# Altium PCB ArDINo.PcbDoc
Units mil, origin at the board's own origin, x right, y up, seen from the top; angles counter-clockwise.
Board outline 3419.29 x 6153.54 mil, 4 copper layers (Top Layer, Internal Plane 1, Mid-Layer 1, Bottom Layer); 40 components, 30 nets, 136 pads, 0 vias.
Unrouted connection lines stored in the file: 49.
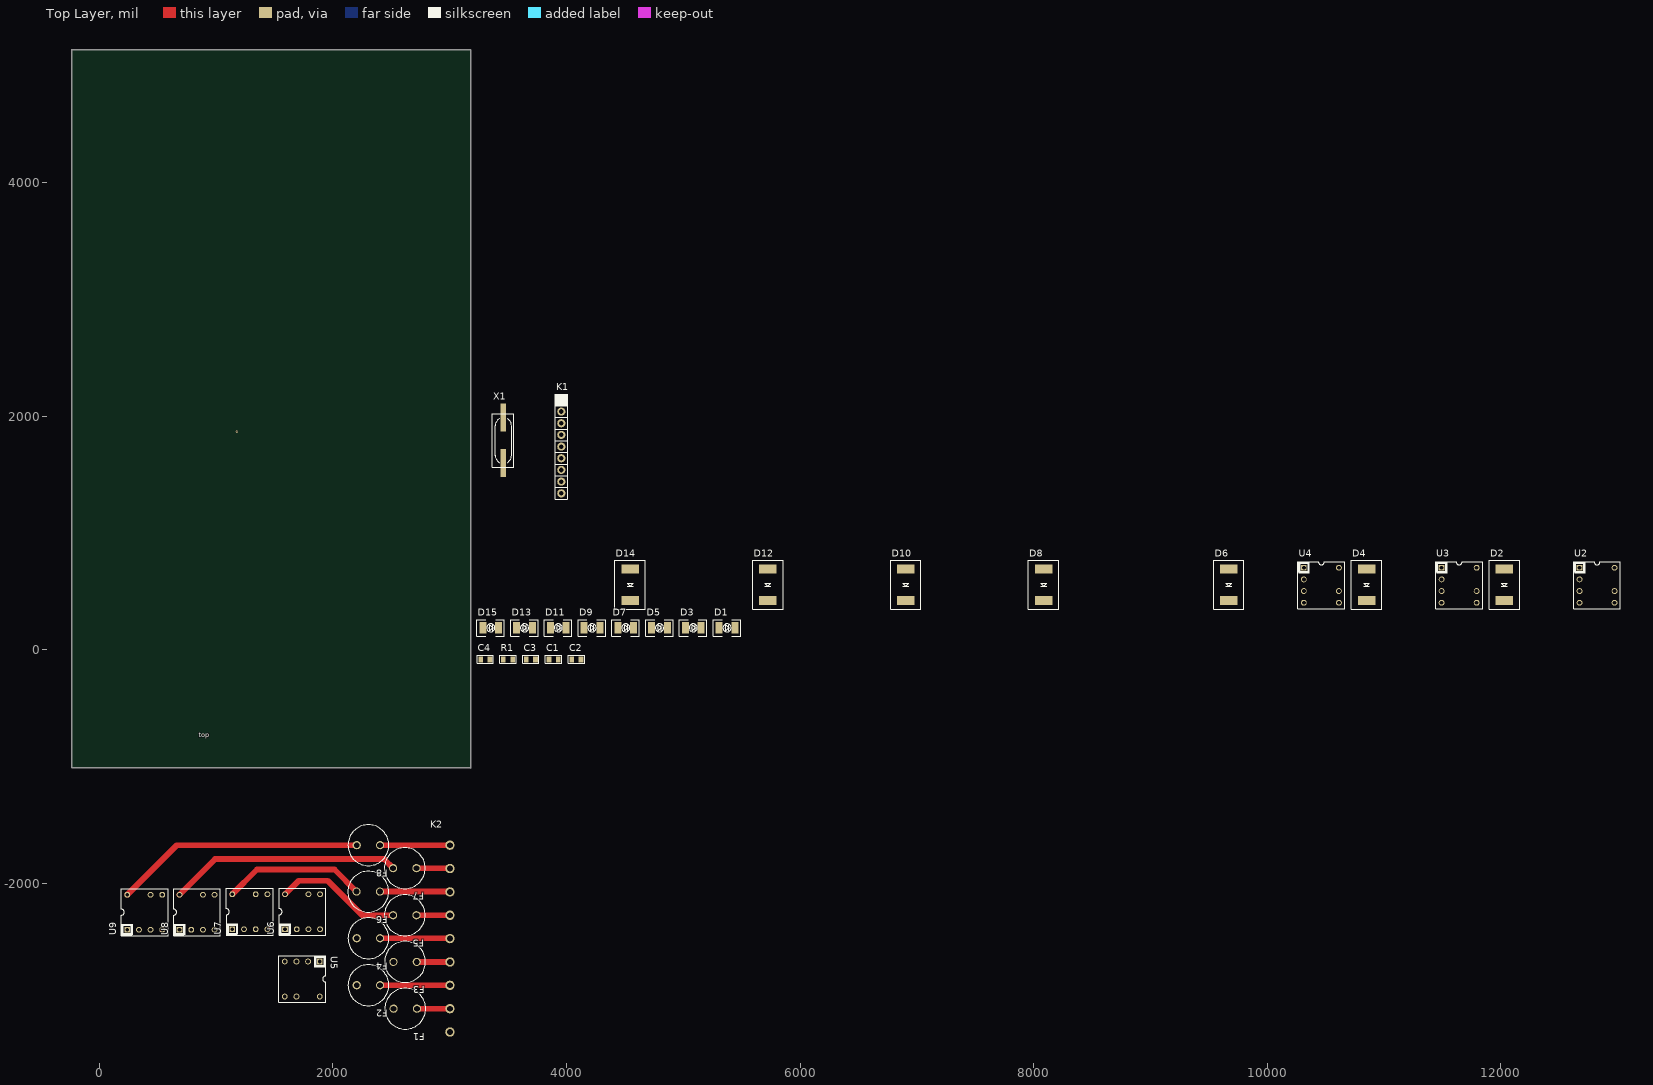
[diagram p0: Top Layer view]
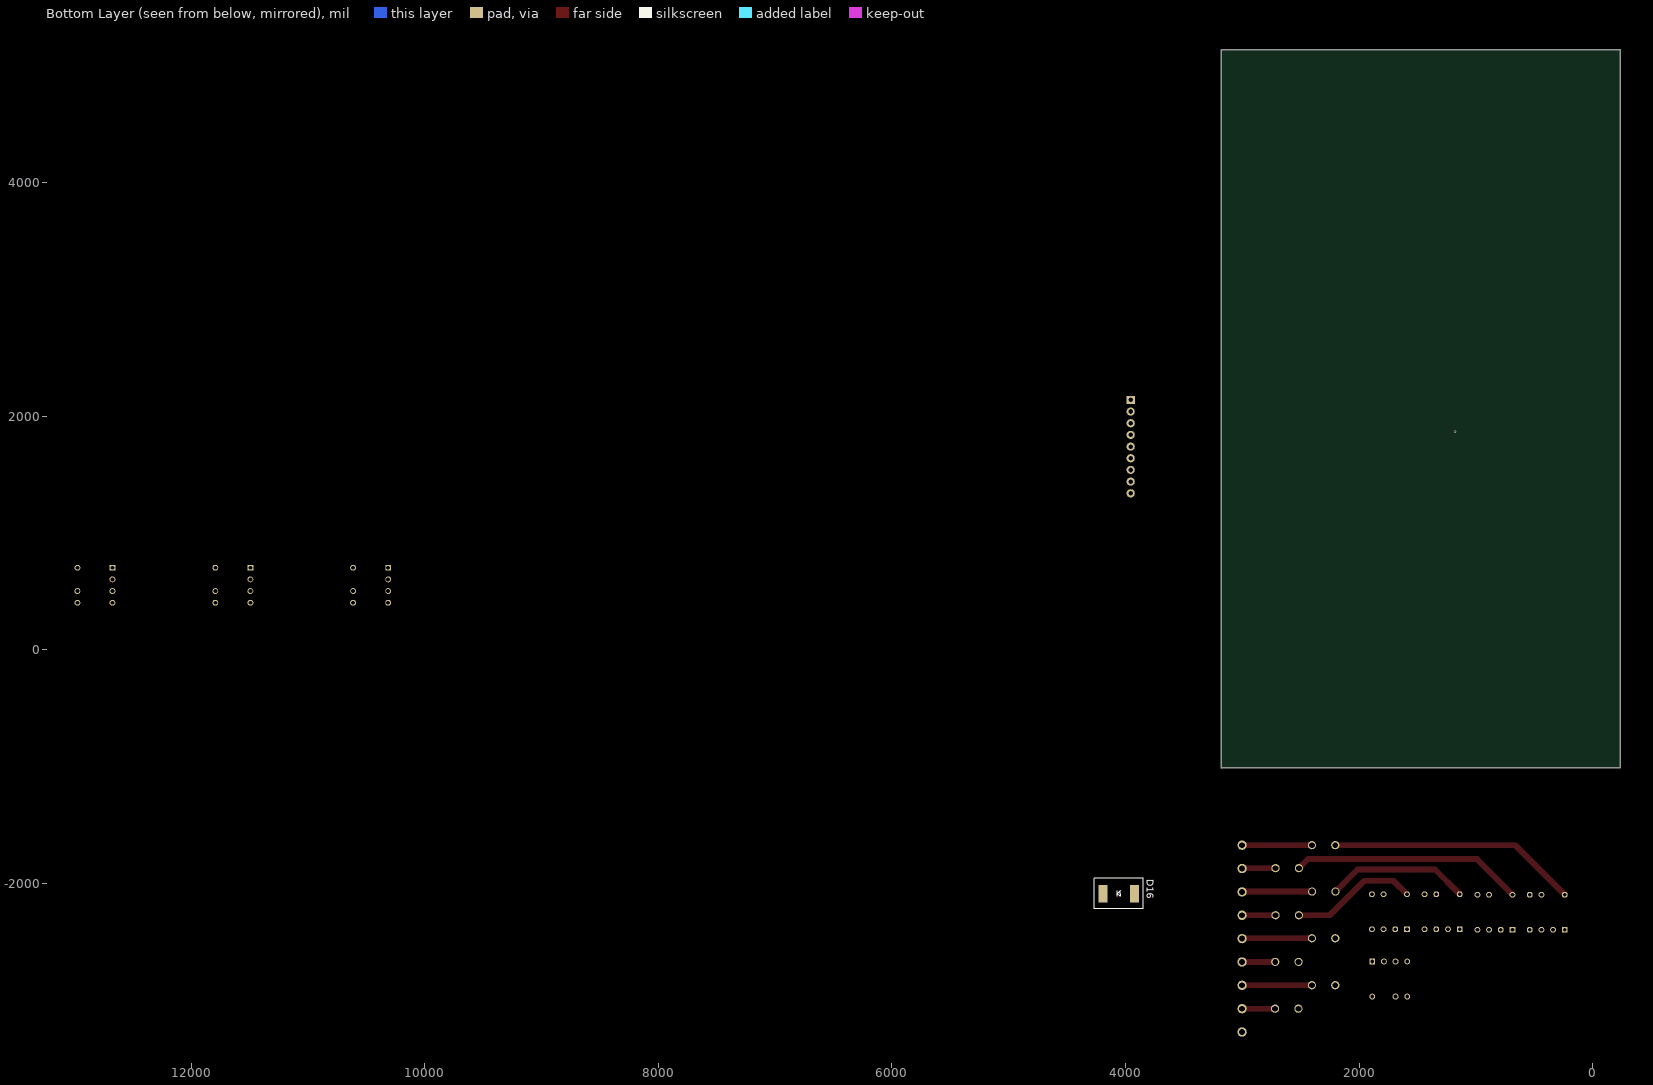
[diagram p1: Bottom Layer view, seen from below]
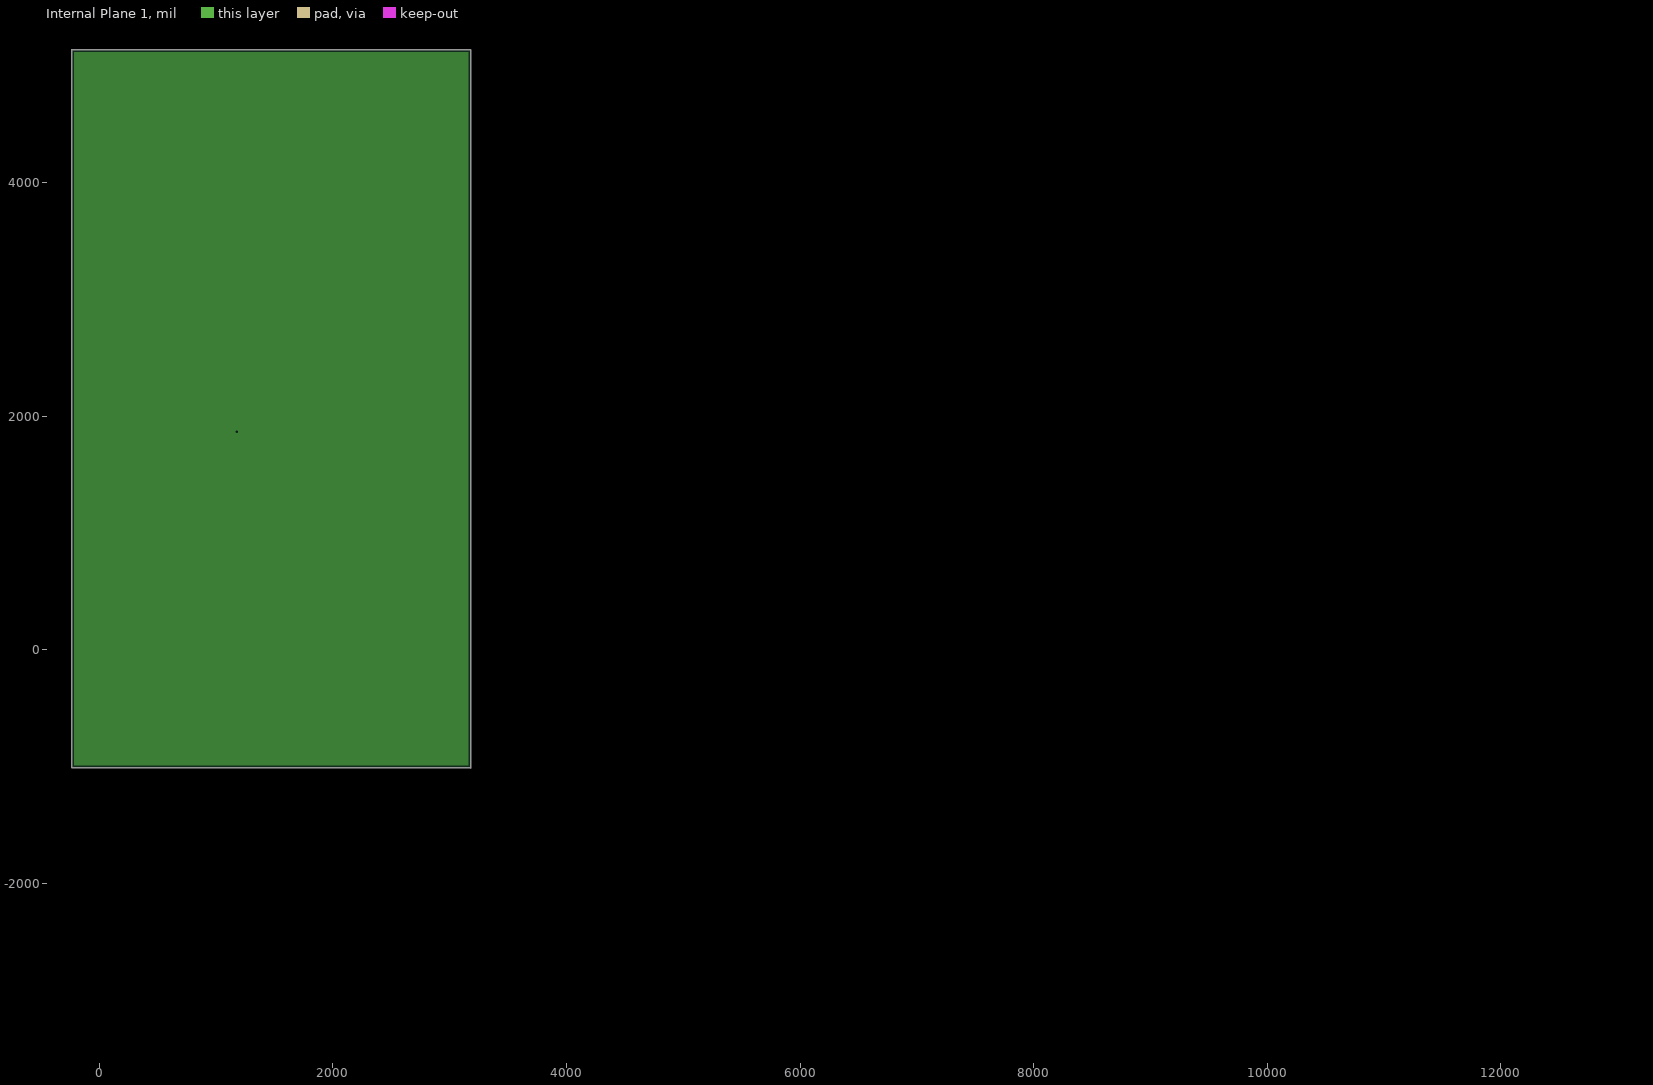
[diagram p2: Internal Plane 1, clearances drawn from the general rule]

## Layer stack, top to bottom
Top Layer: signal copper 1.4
Dielectric: core 12.6, FR-4, Dk 4.8
Internal Plane 1: plane copper 1.4, net GND
Dielectric: prepreg 12.6, FR-4, Dk 4.8
Mid-Layer 1: signal copper 1.4
Dielectric: core 12.6, FR-4, Dk 4.8
Bottom Layer: signal copper 1.4

## Board outline
-237.48,-1011.96 3179.84,-1011.96 3181.81,-1013.93 3181.81,5139.6 -235.52,5139.6 -237.48,5137.64

## Design rules (kind name [scope] priority, off if disabled: settings)
AssemblyTestPointUsage [All] p1 off:
AssemblyTestpoint [All] p1 off: testpointundercomponent=TRUE minsize=40 maxsize=100 preferedsize=60 minholesize=0 maxholesize=40 preferedholesize=32 testpointgrid=1 usegrid=TRUE gridtolerance=0.01 allowsidetop=TRUE allowsidebottom=TRUE
Clearance "WPLGA Clearance" [(InComponent('U8'))] p1: gap=3.5 // Overall Board clearance : this defines the smallest gap if no other rules are in effect
Clearance "Polygons Mid 1" [(InPolygon)] p2: gap=10 // Rule for polygon clearance on Mid Layer 1
Clearance [All] p3: gap=4
ComponentClearance [All] p1 off: gap=10 collisioncheckmode=3 verticalgap=10 showdistances=FALSE
DiffPairsRouting [All] p1 off: maxlimit=10 minlimit=10 mostfreqgap=10 maxuncoupledlength=500
FabricationTestPointUsage TestPointUsage [All] p1 off: valid=0 allowmultiple=FALSE
FabricationTestpoint Testpoint [All] p1 off: side=3 testpointundercomponent=TRUE minsize=40 maxsize=100 preferedsize=60 minholesize=0 maxholesize=40 preferedholesize=32 testpointgrid=1 allowsidetop=TRUE allowsidebottom=TRUE usegrid=TRUE gridtolerance=0.01
FanoutControl Fanout_BGA [IsBGA] p1 off: bgadir=Out bgaviamode=Centered fanoutstyle=Auto fanoutdirection=Alternating viagrid=1 // Fanout_BGA (Default Rule)
FanoutControl Fanout_LCC [IsLCC] p2 off: bgadir=Out bgaviamode=Centered fanoutstyle=Auto fanoutdirection=Alternating viagrid=1 // Fanout_LCC (Default Rule)
FanoutControl Fanout_SOIC [IsSOIC] p3 off: bgadir=Out bgaviamode=Centered fanoutstyle=Auto fanoutdirection=Alternating viagrid=1 // Fanout_SOIC (Default Rule)
FanoutControl Fanout_Small [(CompPinCount < 5)] p4 off: bgadir=Out bgaviamode=Centered fanoutstyle=Auto fanoutdirection=OutThenIn viagrid=1 // Fanout_Small (Default Rule)
FanoutControl Fanout_Default [All] p5 off: bgadir=Out bgaviamode=Centered fanoutstyle=Auto fanoutdirection=Alternating viagrid=1 // Fanout_Default (Default Rule)
Height [All] p1 off: minheight=0 maxheight=1000 prefheight=500
HoleSize [All] p1: absolutevalues=TRUE maxlimit=500 minlimit=1 maxpercent=80.000 minpercent=20.000
LayerPairs [All] p1 off: enforce=TRUE
MinimumAnnularRing "Minimum Annular Ring" [All] p1: minimumring=5 // This is manufacturing dependent. Sierra = 5. This can go to 4 if needed, but keep 5 if possible
MinimumSolderMaskSliver [All] p1 off: minsoldermaskwidth=10
PasteMaskExpansion [All] p1 off: expansion=0
PlaneClearance [All] p1: clearance=6
PlaneConnect "PlaneConnect GND" [InNet('GND')] p1: planeconnectstyle=Direct reliefexpansion=6 reliefentries=4 reliefconductorwidth=10 reliefairgap=6
PlaneConnect "PlaneConnect GENERIC" [All] p2: planeconnectstyle=Relief reliefexpansion=20 reliefentries=4 reliefconductorwidth=10 reliefairgap=10
PolygonConnect [All] p1: connectstyle=Relief reliefconductorwidth=15 reliefentries=4 polygonreliefangle="45 Angle"
RoomDefinition "ArDINo TopLevel" [InComponentClass('ArDINo TopLevel')] p1: confinementstyle=ConfineIn formatcopy=TRUE lockcomponents=FALSE outline -11951,-9580 -9951,-9580 -9951,-8580 -11951,-8580
RoutingPriority [All] p1 off: routingpriority=0
RoutingTopology [All] p1 off: topology=Shortest
RoutingVias "Routing Vias" [All] p1: holewidth=10 width=20 viastyle="Through Hole" minholewidth=10 minwidth=20 maxholewidth=80 maxwidth=100 // Generic routing via rules
ShortCircuit "Short Circuit Generic Rule" [All] p1: allowed=FALSE // Short circuit Rule : No shorts allowed
SilkToSilkClearance [All] p1 off: silktosilkclearance=10
SilkscreenOverComponentPads [All] p1 off: minsilkscreentomaskgap=10
SolderMaskExpansion "SolderMask Expansion Via's" [(IsVia)] p1: expansion=-40 // Via's should be painted closed. Set to -40
SolderMaskExpansion "Solder Mask Expansion Generic" [All] p2: expansion=2 // Generic solder mask expansion
UnRoutedNet "Un Routed Net" [All] p1:  // Broken Nets not allowed
Width [(InNetClass('common-6mil'))] p1: maxlimit=6 minlimit=6 preferedwidth=6 minimp=50.000000 maximp=50.000000 favimp=50.000000 // For Common-6MIL class
Width "Generic Width Rules" [All] p2: maxlimit=100 minlimit=3.5 preferedwidth=10 minimp=50.000000 maximp=50.000000 favimp=50.000000 // Generic width rules applicable if no specific rule is in effect
4 further rules are at their usual default settings.

## Classes and differential pairs
component class "SSR output": D1 D2 D3 D4 D5 D6 D7 D8 D9 D10 D11 D12 D13 D14 D15 D16 F1 F2 F3 F4 F5 F6 F7 F8 K2 U2 U3 U4 U5 U6 U7 U8 U9
component class "ArDINo TopLevel": C1 C2 C3 C4 K1 R1 U1 X1

## Components (designator, comment, footprint, x,y, rotation, side; value= is the part's Value field where it differs from the comment)
C1 "TBD" 0805C-TBD 3860,-82 r0 top
C2 "TBD" 0805C-TBD 4055,-82 r0 top
C3 "TBD" 0805C-TBD 3665,-82 r0 top
C4 "TBD" 0805C-TBD 3275,-82 r0 top
D1 "TOPLED-GREEN" TOPLED-GREEN 5307,188 r0 top
D2 "SMCJ220CA" DIODE-SMC 12031,711 r90 top
D3 "TOPLED-GREEN" TOPLED-GREEN 5018,188 r0 top
D4 "SMCJ220CA" DIODE-SMC 10851,711 r90 top
D5 "TOPLED-GREEN" TOPLED-GREEN 4729,188 r0 top
D6 "SMCJ220CA" DIODE-SMC 9671,711 r90 top
D7 "TOPLED-GREEN" TOPLED-GREEN 4440,188 r0 top
D8 "SMCJ220CA" DIODE-SMC 8086,711 r90 top
D9 "TOPLED-GREEN" TOPLED-GREEN 4151,188 r0 top
D10 "SMCJ220CA" DIODE-SMC 6905,711 r90 top
D11 "TOPLED-GREEN" TOPLED-GREEN 3862,188 r0 top
D12 "SMCJ220CA" DIODE-SMC 5725,711 r90 top
D13 "TOPLED-GREEN" TOPLED-GREEN 3573,188 r0 top
D14 "SMCJ220CA" DIODE-SMC 4545,711 r90 top
D15 "TOPLED-GREEN" TOPLED-GREEN 3284,188 r0 top
D16 "SMCJ220CA" DIODE-SMC 3904,-2087 r180 bottom
F1 "FUSE-372SERIES" FUSE-372 2720,-3073 r180 top
F2 "FUSE-372SERIES" FUSE-372 2404,-2872 r180 top
F3 "FUSE-372SERIES" FUSE-372 2718,-2672 r180 top
F4 "FUSE-372SERIES" FUSE-372 2404,-2470 r180 top
F5 "FUSE-372SERIES" FUSE-372 2716,-2273 r180 top
F6 "FUSE-372SERIES" FUSE-372 2403,-2071 r180 top
F7 "FUSE-372SERIES" FUSE-372 2716,-1870 r180 top
F8 "FUSE-372SERIES" FUSE-372 2404,-1673 r180 top
K1 "HEADER-1X9" HEADER-1X9 3956,2140 r0 top
K2 "PRKR-9-5.08MM" PRKR-9-5.08MM 3002,-3273 r90 top
R1 "10K" 0805R-10K 3470,-82 r0 top
U2 "PR39MF21" dip8-ssr 12675,703 r0 top
U3 "PR39MF21" dip8-ssr 11494,703 r0 top
U4 "PR39MF21" dip8-ssr 10314,703 r0 top
U5 "PR39MF21" dip8-ssr 1888,-2669 r270 top
U6 "PR39MF21" dip8-ssr 1591,-2393 r90 top
U7 "PR39MF21" dip8-ssr 1139,-2393 r90 top
U8 "PR39MF21" dip8-ssr 687,-2397 r90 top
U9 "PR39MF21" dip8-ssr 239,-2397 r90 top
X1 "CRYSTAL-GENERIC" XTAL-RU49/4 3460,1598 r90 top

## Footprints (in the part's own frame and the unit in brackets; to place one, negate y for a bottom-side part, rotate by r counter-clockwise, add the part's x,y. Pads: shape width x height; smd on the part's side, far side on the other; paste and mask are expansions set on the pad)
0805C-TBD [mil] "CAPACITOR 0805"
  rect 40x50 smd: 1(-10,0) 2(70,0)
  silkscreen extent -40,-35 100,35, body extent -11,-25 70,25, height 26
0805R-10K [mil] "RESISTOR 0805"
  rect 40x50 smd: 1(-10,0) 2(70,0)
  silkscreen extent -40,-35 100,35, body extent -11,-25 70,25, height 27
DIODE-SMC [mil]
  rect 80x150 smd: A(-19.68,0) K(-288.74,0)
  silkscreen extent -365,-130 55,130, body extent -312,-122 -3,122, height 88
dip8-ssr [mil]
  rect 50x50 hole 33: 1(0,0)
  round 50 hole 33: 2(0,-100) 3(0,-200) 4(0,-300) 5(300,-300) 6(300,-200) 8(300,0)
  silkscreen extent -50,-350 350,50, body extent -5,-365 305,65, height 200
FUSE-372 [mil]
  round 70 hole 50 unplated mask+2: 1(0,0) 2(200,0)
  silkscreen extent -75,-175 275,175, body extent -66,-167 267,167, height 315
HEADER-1X9 [mil]
  rect 70x70 hole 40: 1(0,0)
  round 70 hole 40: 2(0,-100) 3(0,-200) 4(0,-300) 5(0,-400) 6(0,-500) 7(0,-600) 8(0,-700) 9(0,-800)
  silkscreen extent -50,-850 50,50, body extent -50,-850 50,50, height 470
PRKR-9-5.08MM [mil]
  round 80 hole 50 unplated mask+2: 1(0,0) 2(200,0) 3(400,0) 4(600,0) 5(800,0) 6(1000,0) 7(1200,0) 8(1400,0) 9(1600,0)
  body extent -100,-177 1720,177, height 598
TOPLED-GREEN [mil]
  rect 60x100 smd: A(0,0) K(135,0)
  silkscreen extent -50,-70 185,70, body extent -20,-60 154,60, height 75
XTAL-RU49/4 [mil]
  rect 240x47.24 smd: 1(0,0) 2(390,0)
  silkscreen extent -35,-90 425,95, body extent -78,-90 468,95, height 120

## Part data
C1 C2 C3 C4: library part 0805C-TBD, "CAPACITOR 0805 CERAMIC VALUE TO BE DETERMINED"
D2 D4 D6 D8 D10 D12 D14 D16: "Transient Surpression Diode TVS"
F1 F2 F3 F4 F5 F6 F7 F8: "FUSE-372"
R1: library part 0805R-10K, "RESISTOR 0805 1/4 WATT THIN FILM"
X1: "GENERIC CRYSTAL"

## Free pads (board coordinates)
  round 20 on Mech1 mask+2: 0(747,1721)
  round 20 hole 10 unplated mask+2: 0(1178,1867)

## Nets (pads, with @x,y where several pads share a name; then routed paths per layer and width w, separated by ;. In a path a pad name is that pad's centre, name@x,y a point inside that pad or via, vN(x,y) a via of type N, cw(c..) or ccw(c..) an arc to the next point about the centre after c; other vN are vias at no path point)
GND: C1.1 C2.1 C4.2
NetC1_2: C1.2 X1.1
NetC2_2: C2.2 X1.2
NetC3_2: C3.2 C4.1 R1.2
NetD1_A: D1.A D3.A D5.A D7.A D9.A D11.A D13.A D15.A
NetD1_K: D1.K U2.2
NetD2_A: D2.A D4.A D6.A D8.A D10.A D12.A D14.A D16.A K2.1 U2.6 U3.6 U4.6 U5.6 U6.6 U7.6 U8.6 U9.6
NetD2_K: D2.K F1.2 U2.8
NetD3_K: D3.K U3.2
NetD4_K: D4.K F2.2 U3.8
NetD5_K: D5.K U4.2
NetD6_K: D6.K F3.2 U4.8
NetD7_K: D7.K U5.2
NetD8_K: D8.K F4.2 U5.8
NetD9_K: D9.K U6.2
NetD10_K: D10.K F5.2 U6.8 | length 1095.7
  Top Layer w50: U6.8 1707,-1977 1955,-1977 2251,-2273 F5.2
NetD11_K: D11.K U7.2
NetD12_K: D12.K F6.2 U7.8 | length 1230.5
  Top Layer w50: U7.8 1351,-1881 2013,-1881 F6.2
NetD13_K: D13.K U8.2
NetD14_K: D14.K F7.2 U8.8 | length 1987.6
  Top Layer w50: U8.8 992,-1792 2438,-1792 F7.2
NetD15_K: D15.K U9.2
NetD16_K: D16.K F8.2 U9.8 | length 2140.6
  Top Layer w50: U9.8 663,-1673 F8.2
NetF1_1: F1.1 K2.2 | length 286
  Top Layer w50: F1.1@2716,-3073 K2.2
NetF2_1: F2.1 K2.3 | length 598.4
  Top Layer w50: F2.1 3001,-2872 K2.3
NetF3_1: F3.1 K2.4 | length 286.4
  Top Layer w50: F3.1@2716,-2672 3001,-2672 K2.4
NetF4_1: F4.1 K2.5 | length 599.2
  Top Layer w50: F4.1 2999,-2470 K2.5
NetF5_1: F5.1 K2.6 | length 286
  Top Layer w50: F5.1 K2.6
NetF6_1: F6.1 K2.7 | length 598.8
  Top Layer w50: F6.1@2404,-2071 3000,-2071 K2.7
NetF7_1: F7.1 K2.8 | length 287.2
  Top Layer w50: F7.1 2999,-1870 K2.8
NetF8_1: F8.1 K2.9 | length 598
  Top Layer w50: F8.1 K2.9
pads on no net: C3.1 K1.1 K1.2 K1.3 K1.4 K1.5 K1.6 K1.7 K1.8 K1.9 R1.1 U2.1 U2.3 U2.4 U2.5 U3.1 U3.3 U3.4 U3.5 U4.1 U4.3 U4.4 U4.5 U5.1 U5.3 U5.4 U5.5 U6.1 U6.3 U6.4 U6.5 U7.1 U7.3 U7.4 U7.5 U8.1 U8.3 U8.4 U8.5 U9.1 U9.3 U9.4 U9.5

## Polygon pours and split planes (outlines as drawn)
GND on Internal Plane 1 (split plane): 3161.71,-991.87 -217.39,-991.87 -217.39,5119.5 3161.71,5119.5

## Silkscreen, mask and mechanical layers (free items; w line width, h text height)
Top Overlay:
  text "top" at 851,-747 h40
Mechanical 1:
  lines w10: -3444.36,-972.19 -1133.34,-972.19 -1133.34,5149.86 -3444.36,5149.86 -3444.36,-972.19 ; -237.48,-1011.96 3179.84,-1011.96 3181.81,-1013.93 3181.81,5139.6 -235.52,5139.6 -237.48,5137.64 -237.48,-1011.96